# Altium PCB D5035_01.PcbDoc
Units mil, origin at the board's own origin, x right, y up, seen from the top; angles counter-clockwise.
Board outline 2401.57 x 1299.21 mil, 2 copper layers (Top Layer, Bottom Layer), stack 61.811 mil thick; 73 components, 59 nets, 270 pads, 40 vias.
Unrouted connection lines stored in the file: 1.
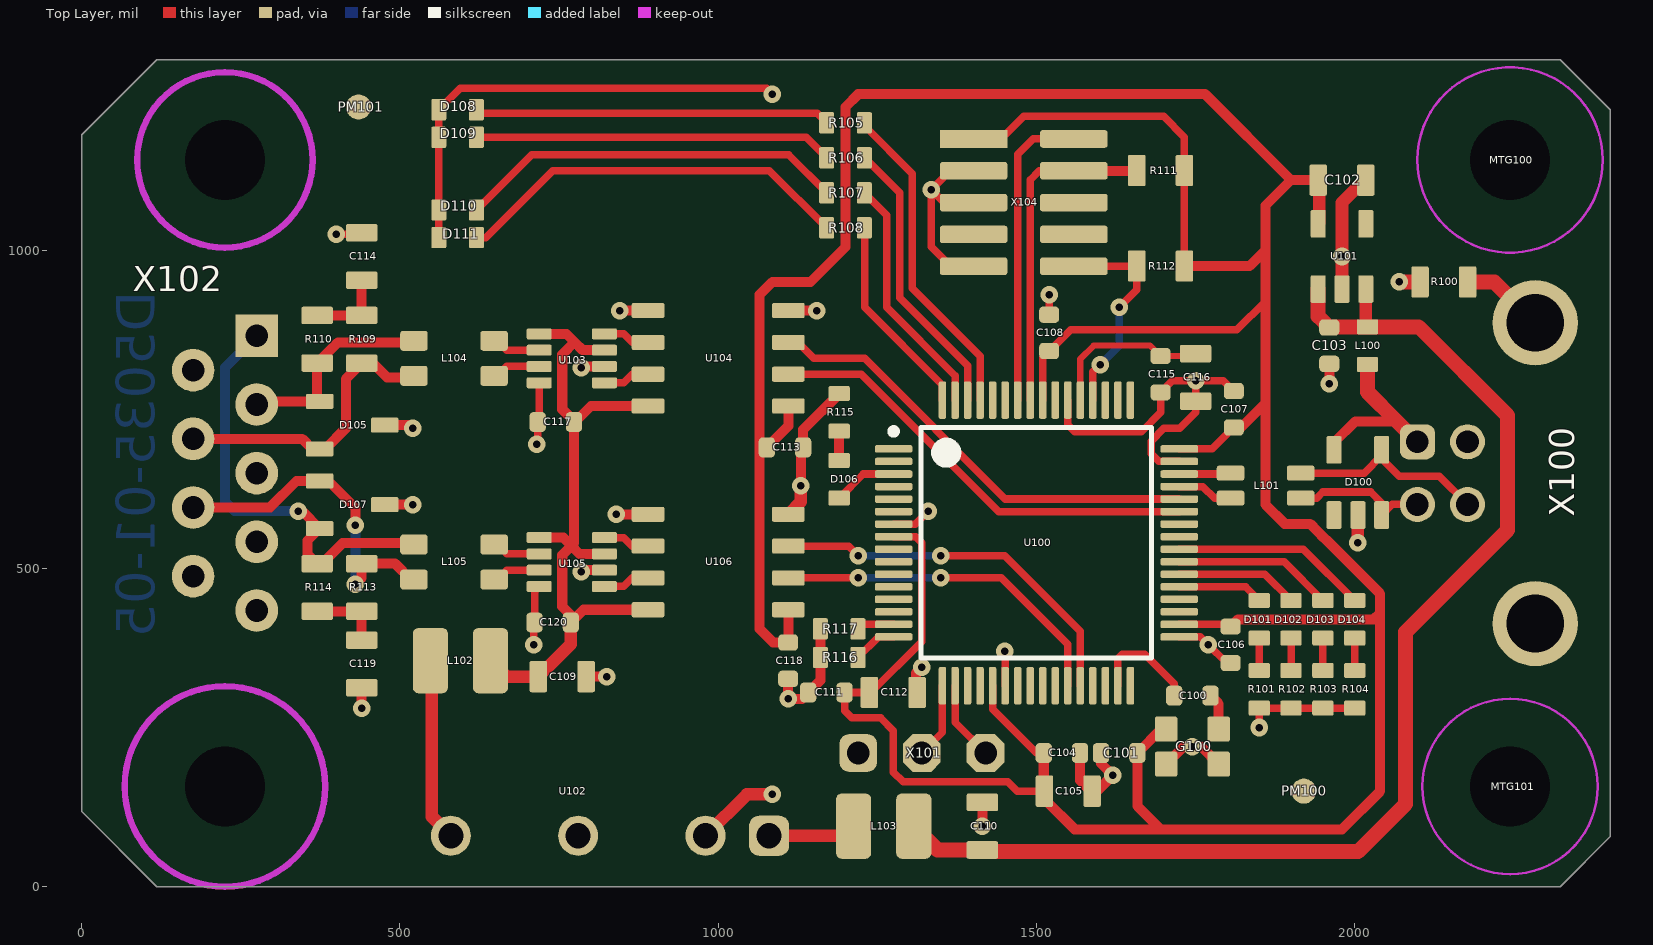
[diagram p0: Top Layer view]
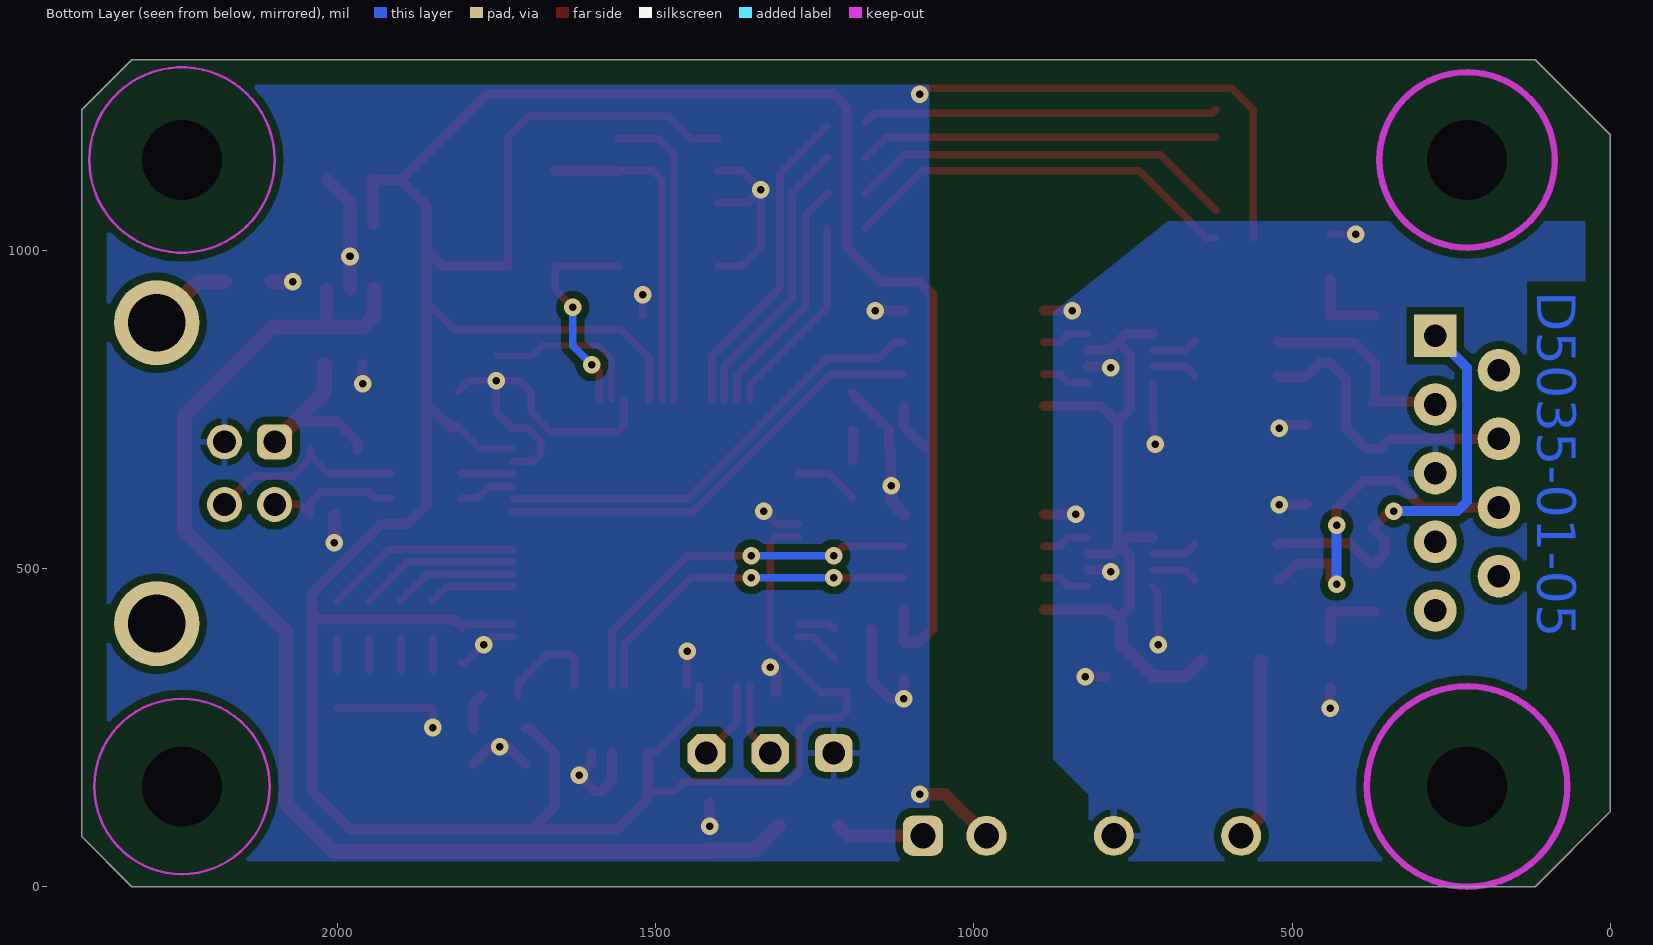
[diagram p1: Bottom Layer view, seen from below]

## Layer stack, top to bottom
Top Solder: solder mask 0.3937, Solder Resist, Dk 3.5
Top Layer: signal copper 1.378
Dielectric 1: dielectric 59.0551, FR-4, Dk 4.8
Bottom Layer: signal copper 1.378
Bottom Solder: solder mask 0.3937, Solder Resist, Dk 3.5

## Board outline
0,118.11 0,1181.1 118.11,1299.21 2322.83,1299.21 2401.57,1220.47 2401.57,78.74 2322.83,0 118.11,0

## Design rules (kind name [scope] priority, off if disabled: settings)
BoardOutlineClearance [All] p1: gap=39.37 ignorepadtopadclearanceinfootprint=FALSE
Clearance [All] p1: gap=6 ignorepadtopadclearanceinfootprint=FALSE except(0: Arc-Hole Track-Hole SMDPad-Hole THPad-Hole Via-Hole Fill-Hole Poly-Hole Region-Hole Text-Hole; 12: Arc-Poly Track-Poly SMDPad-Poly THPad-Poly Via-Poly Fill-Poly Poly-Poly) // 1
DiffPairsRouting [All] p1: maxlimit=10 minlimit=7.87 mostfreqgap=10 toplayer_minwidth=9.84 toplayer_maxwidth=15 toplayer_prefwidth=11.81 bottomlayer_minwidth=9.84 bottomlayer_maxwidth=15 bottomlayer_prefwidth=11.81 maxuncoupledlength=500
HoleSize [All] p1: absolutevalues=TRUE maxlimit=200 minlimit=11.81 maxpercent=80.000 minpercent=20.000
MinimumSolderMaskSliver [All] p1: minsoldermaskwidth=2
PasteMaskExpansion [All] p1 off: expansion=0
PolygonConnect PolygonConnect_2 [IsVia] p1: connectstyle=Direct reliefconductorwidth=10 reliefentries=4 polygonreliefangle="90 Angle" airgapwidth=10
PolygonConnect PolygonConnect_1 [IsPad] p2: thpad.connectstyle=Relief thpad.reliefconductorwidth=10 thpad.reliefentries=4 thpad.polygonreliefangle="90 Angle" thpad.airgapwidth=10 smdpad.connectstyle=Direct smdpad.reliefconductorwidth=10 smdpad.reliefentries=4 smdpad.polygonreliefangle="90 Angle" smdpad.airgapwidth=10 via.connectstyle=Direct via.reliefconductorwidth=10 via.reliefentries=4 via.polygonreliefangle="90 Angle" via.airgapwidth=10
PolygonConnect [All] p3: connectstyle=Relief reliefconductorwidth=16 reliefentries=4 polygonreliefangle="90 Angle" airgapwidth=10
RoutingVias [All] p1: holewidth=11.81 width=23.62 viastyle="Through Hole" minholewidth=11.81 minwidth=23.62 maxholewidth=39.37 maxwidth=78.74
SilkToBoardRegionClearance [All] p1 off:
SilkToSilkClearance [All] p1 off: silktosilkclearance=10
SilkToSolderMaskClearance [IsPad] p1 off: minsilkscreentomaskgap=10 clearancetoexposedcopper=TRUE
SolderMaskExpansion SolderMaskExpansion_VIA [IsVia] p1: expansion=2 istentingtop=FALSE soldermaskfromhole=TRUE
SolderMaskExpansion [All] p2: expansion=2 istentingtop=FALSE
Width [All] p1: maxlimit=100 minlimit=9.84 preferedwidth=11.81 minimp=50.000000 maximp=50.000000 favimp=50.000000
23 further rules are at their usual default settings.

## Components (designator, comment, footprint, x,y, rotation, side; value= is the part's Value field where it differs from the comment)
C100 "10n" CAPC1608X09L 1745,300 r0 top
C101 "100n" CAPC1608X09L 1630,210 r0 top
C102 "4µ7" CAPC2012X14L 1980,1110 r180 top
C103 "100n" CAPC1608X09L 1960,850 r90 top
C104 "100n" CAPC1608X09L 1540,210 r180 top
C105 "4µ7" CAPC2012X14L 1550,150 r180 top
C106 "100n" CAPC1608X09L 1805,380 r90 top
C107 "100n" CAPC1608X09L 1810,750 r270 top
C108 "100n" CAPC1608X09L 1520,870 r270 top
C109 "4µ7" CAPC2012X14L 755,330 r180 top
C110 "4µ7" CAPC2012X14L 1415,95 r270 top
C111 "100n" CAPC1608X09L 1170,305 r0 top
C112 "4µ7" CAPC2012X14L 1275,305 r180 top
C113 "100n" CAPC1608X09L 1105,690 r180 top
C114 "4n7" CAPC2012X14L 440,990 r270 top
C115 "100n" CAPC1608X09L 1695,805 r90 top
C116 "4µ7" CAPC2012X14L 1750,800 r90 top
C117 "100n" CAPC1608X09L 745,730 r0 top
C118 "100n" CAPC1608X09L 1110,355 r90 top
C119 "4n7" CAPC2012X14L 440,350 r90 top
C120 "100n" CAPC1608X09L 740,415 r0 top
D100 "WE_824011" SOT95P280X110-5N 2005,635 r90 top
D101 "red" DIOC1608X06N_LED 1850,420 r90 top
D102 "yellow" DIOC1608X06N_LED 1900,420 r90 top
D103 "green" DIOC1608X06N_LED 1950,420 r90 top
D104 "blue" DIOC1608X06N_LED 2000,420 r90 top
D105 "PESD1CAN" SOT95P280X110-3N 425,725 r0 top
D106 "green" DIOC1608X06N_LED 1190,640 r270 top
D107 "PESD1CAN" SOT95P280X110-3N 425,600 r0 top
D108 "green" DIOC1608X06N_LED 590.55,1220.47 r0 top
D109 "red" DIOC1608X06N_LED 590.55,1177.17 r0 top
D110 "green" DIOC1608X06N_LED 590.55,1062.99 r0 top
D111 "red" DIOC1608X06N_LED 590.55,1019.69 r0 top
G100 "16MHz" TG2520 1745,220 r0 top
L100 "WE_742792641" INDC1608X06L 2020,850 r90 top
L101 "WE_744232090" WE_744232090 1860,630 r180 top
L102 "82103C" Murata_8200C 595,355 r0 top
L103 "82103C" Murata_8200C 1260,95 r180 top
L104 "DLW32SH101XF2L‎" ACT1210 585,830 r0 top
L105 "DLW32SH101XF2L‎" ACT1210 585,510 r0 top
MTG100 "MH_M3" HOLE_3_2MM 2244.09,1141.73 r0 top
MTG101 "MH_M3" HOLE_3_2MM 2244.09,157.48 r0 top
PM100 "Fidicual" PM100 1920,150 r0 top
PM101 "Fidicual" PM100 435,1225 r0 top
R100 "100k" RESC2012X06L 2140,950 r0 top
R101 "1k" RESC1608X06L 1850,310 r90 top
R102 "1k" RESC1608X06L 1900,310 r90 top
R103 "1k" RESC1608X06L 1950,310 r90 top
R104 "1k" RESC1608X06L 2000,310 r90 top
R105 "1k" RESC1608X06L 1200,1200 r0 top
R106 "1k" RESC1608X06L 1200,1145 r0 top
R107 "1k" RESC1608X06L 1200,1090 r0 top
R108 "1k" RESC1608X06L 1200,1035 r0 top
R109 "4k7" RESC2012X06L 440,860 r270 top
R110 "4k7" RESC2012X06L 370,860 r270 top
R111 "10k" RESC2012X06L 1695,1125 r0 top
R112 "10k" RESC2012X06L 1695,975 r0 top
R113 "4k7" RESC2012X06L 440,470 r90 top
R114 "4k7" RESC2012X06L 370,470 r90 top
R115 "1k" RESC1608X06L 1190,745 r270 top
R116 "1k" RESC1608X06L 1190,360 r180 top
R117 "1k" RESC1608X06L 1190,405 r180 top
U100 "SAME51J18A-AU / SAME51J19A-AU" TSQFP50P1200X1200X120-64N 1500,540 r0 top
U101 "MIC5317-3.3YD5" SOT95P280X110-5N 1980,990 r90 top
U102 "MER1S0505SC" MER1SxxxxC 780,80 r180 top
U103 "TCAN1044V" SOT65P280X100-8N 770,830 r180 top
U104 "SI8621EC-B-IS" SOIC127P600X175-8N 1000,830 r180 top
U105 "TCAN1044V" SOT65P280X100-8N 770,510 r180 top
U106 "SI8621EC-B-IS" SOIC127P600X175-8N 1000,510 r180 top
X100 "61729-0010BLF" 61729-XXXXXLF 2283.46,649.61 r90 top
X101 "1x3 2,54mm" PINH_1x03_2_54mm 1320,210 r0 top
X102 "9651226803" 09651226803 275,649.61 r90 top
X104 "SWD" FTSH-105-01-L-DV-K 1480,1075 r270 top

## Footprints (in the part's own frame and the unit in brackets; to place one, negate y for a bottom-side part, rotate by r counter-clockwise, add the part's x,y. Pads: shape width x height; smd on the part's side, far side on the other; paste and mask are expansions set on the pad)
61729-XXXXXLF [mm] "USB Buchse"
  rrect50% 1.4x1.4 hole 0.9: 1(1.25,4.7)
  round 1.4 hole 0.9: 2(-1.25,4.7) 3(-1.25,2.7) 4(1.25,2.7)
  round 3.4 hole 2.3: Shell(-6,0) Shell(6,0)
  body extent -6.56,-10 6.56,5.94, height 1.15
09651226803 [mm]
  rect 1.7x1.7 hole 0.9: 1(5.48,0)
  round 1.7 hole 0.9: 2(2.74,0) 3(0,0) 4(-2.74,0) 5(-5.48,0) 6(4.11,2.54) 7(1.37,2.54) 8(-1.37,2.54) 9(-4.11,2.54)
  round 0 hole 3.2 unplated: SH(-12.5,1.27) SH(12.5,1.27)
  body extent -15.6,-2 15.6,19.2, height 13.62
ACT1210 [mm]
  rrect30% 1.1x0.8 smd: 1(-1.6,0.7) 2(-1.6,-0.7) 3(1.6,-0.7) 4(1.6,0.7)
  body extent -1.6,-1.3 1.6,1.3, height 2.5
CAPC1608X09L [mm] "Chip Capacitor, 2-Leads, Body 1,6x0,8mm, IPC High Density"
  rrect50% 0.65x0.8 smd: 1(-0.725,0) 2(0.725,0)
  body extent -0.8,-0.4 0.8,0.4, height 0.6
CAPC2012X14L [mm] "Chip Capacitor, 2-Leads, Body 2,0x1,3mm, IPC High Density"
  rrect20% 0.7x1.25 smd: 1(-0.95,0) 2(0.95,0)
  body extent -1,-0.62 1,0.62, height 0.6
DIOC1608X06N_LED [mm]
  rrect20% 0.6x0.85 smd: 1(-0.75,0) 2(0.75,0)
  body extent -0.8,-0.4 0.8,0.4, height 0.7
FTSH-105-01-L-DV-K [mm] "SAMTEC FTSH 5pin doppelreihig, 1,27mm x 1,27mm"
  rect 0.7x2.7 smd: 1(-2.53,-2)
  rrect30% 0.7x2.7 smd: 2(-2.53,2) 3(-1.26,-2) 4(-1.26,2) 5(0.01,-2) 6(0.01,2) 7(1.28,-2) 8(1.28,2) 9(2.55,-2) 10(2.55,2)
  body extent -3.17,-2.92 3.18,2.92, height 6.11
HOLE_3_2MM [mm] "Mouting-Hole for screws M3 with keepout for washer"
  round 0 hole 3.2 unplated: 1(0,0)
  Keep-Out Layer circle w0.1: c0,0 r3.7
INDC1608X06L [mm] "Ferrite Bead 2-Leads, Body 1,6x0,8mm, IPC High Density"
  rrect20% 0.6x0.85 smd: 1(-0.75,0) 2(0.75,0)
  body extent -0.8,-0.4 0.8,0.4, height 0.8
MER1SxxxxC [mm]
  rrect50% 1.6x1.6 hole 1: 1(-7.62,0)
  round 1.6 hole 1: 2(-5.08,0) 4(0,0) 6(5.08,0)
  body extent -9.5,-4.77 10,1.25, height 10.1
Murata_8200C [mm]
  rrect30% 1.4x2.6 smd paste+0 mask+0.102: 1(-1.2,0)
  rrect30% 1.4x2.6 smd: 2(1.2,0)
  body extent -1.55,-1.26 1.65,1.24, height 2
PINH_1x03_2_54mm [mm] "Pin-Header 3 polig"
  rrect50% 1.5x1.5 hole 0.9: 1(-2.54,0)
  oct 1.5x1.5 hole 0.9: 2(0,0) 3(2.54,0)
  body extent -3.94,-1.27 3.81,1.27, height 8.38
PM100 [mm] "Passermarke für Bestueckungsautomaten rund"
  rect 0.2x0.2 smd mask+1: 1(0,0)
  round 1 smd: 1(0,0)
  Top Layer pour cut-out: -1.2,1.2 1.2,1.2 1.2,-1.2 -1.2,-1.2
RESC1608X06L [mm] "Chip Resistor, 2-Leads, Body 1,6x0,8mm, IPC High Density"
  rrect20% 0.6x0.85 smd: 1(-0.75,0) 2(0.75,0)
  body extent -0.8,-0.4 0.8,0.4, height 0.4
RESC2012X06L [mm] "Chip Resistor, 2-Leads, Body 2,0x1,3mm, IPC High Density"
  rrect20% 0.7x1.25 smd: 1(-0.95,0) 2(0.95,0)
  body extent -1,-0.63 1,0.63, height 0.5
SOIC127P600X175-8N [mm] "SOIC, 8-Leads, Body 5,0x4,0mm (max), Pitch 1,27mm, IPC Medium Density"
  rrect20% 1.3x0.6 smd: 1(-2.8,1.905) 2(-2.8,0.635) 3(-2.8,-0.635) 4(-2.8,-1.905) 5(2.8,-1.905) 6(2.8,-0.635) 7(2.8,0.635) 8(2.8,1.905)
  body extent -3,-2.45 3,2.45, height 1.7
SOT65P280X100-8N [mm] "SOT23, 8-Leads, Body 3,0x3,0mm (max), Pitch 0,65mm, IPC Medium Density"
  rrect30% 1x0.44 smd: 1(-1.3,0.975) 2(-1.3,0.325) 3(-1.3,-0.325) 4(-1.3,-0.975) 5(1.3,-0.975) 6(1.3,-0.325) 7(1.3,0.325) 8(1.3,0.975)
  body extent -1.47,-1.47 1.47,1.47, height 1.1
SOT95P280X110-3N [mm] "SOT23, 3-Leads, Body 3,0x3,0mm (max), Pitch 0,95mm, IPC Medium Density"
  rrect20% 1.1x0.6 smd: 1(-1.3,0.95) 2(-1.3,-0.95) 3(1.3,0)
  body extent -1.4,-1.45 1.4,1.45, height 1.3
SOT95P280X110-5N [mm] "SOT23, 5-Leads, Body 3,0x3,0mm (max), Pitch 0,95mm, IPC Medium Density"
  rrect20% 1.1x0.6 smd: 1(-1.3,0.95) 2(-1.3,0) 3(-1.3,-0.95) 4(1.3,-0.95) 5(1.3,0.95)
  body extent -1.4,-1.45 1.4,1.45, height 1.45
TG2520 [mm]
  rrect20% 0.9x1 smd: 1(-1.05,-0.7) 2(1.05,-0.7) 3(1.05,0.7) 4(-1.05,0.7)
  body extent -1.3,-1.06 1.3,1.04, height 0.8
TSQFP50P1200X1200X120-64N [mm] "TSQFP, 64-Leads, Body 10,00x10,00mm, Pitch 0,50mm, IPC Medium Density"
  rrect50% 1.5x0.3 smd: 1(-5.7,3.75) 2(-5.7,3.25) 3(-5.7,2.75) 4(-5.7,2.25) 5(-5.7,1.75) 6(-5.7,1.25) 7(-5.7,0.75) 8(-5.7,0.25) 9(-5.7,-0.25) 10(-5.7,-0.75) 11(-5.7,-1.25) 12(-5.7,-1.75) 13(-5.7,-2.25) 14(-5.7,-2.75) 15(-5.7,-3.25) 16(-5.7,-3.75) 33(5.7,-3.75) 34(5.7,-3.25) 35(5.7,-2.75) 36(5.7,-2.25) 37(5.7,-1.75) 38(5.7,-1.25) 39(5.7,-0.75) 40(5.7,-0.25) 41(5.7,0.25) 42(5.7,0.75) 43(5.7,1.25) 44(5.7,1.75) 45(5.7,2.25) 46(5.7,2.75) 47(5.7,3.25) 48(5.7,3.75)
  rrect50% 0.3x1.5 smd: 17(-3.75,-5.7) 18(-3.25,-5.7) 19(-2.75,-5.7) 20(-2.25,-5.7) 21(-1.75,-5.7) 22(-1.25,-5.7) 23(-0.75,-5.7) 24(-0.25,-5.7) 25(0.25,-5.7) 26(0.75,-5.7) 27(1.25,-5.7) 28(1.75,-5.7) 29(2.25,-5.7) 30(2.75,-5.7) 31(3.25,-5.7) 32(3.75,-5.7) 49(3.75,5.7) 50(3.25,5.7) 51(2.75,5.7) 52(2.25,5.7) 53(1.75,5.7) 54(1.25,5.7) 55(0.75,5.7) 56(0.25,5.7) 57(-0.25,5.7) 58(-0.75,5.7) 59(-1.25,5.7) 60(-1.75,5.7) 61(-2.25,5.7) 62(-2.75,5.7) 63(-3.25,5.7) 64(-3.75,5.7)
  silkscreen extent -5.82,-4.6 4.6,4.6, body extent -6,-6 6,6, height 1.2
WE_744232090 [mm] "SMD Stromkomp. Datenleitungsfilter WE-CNSW"
  rrect30% 1.1x0.6 smd: 1(-1.4,0.5) 2(1.4,0.5) 3(1.4,-0.5) 4(-1.4,-0.5)
  body extent -1.7,-0.9 1.7,0.9, height 1.8

## Part data
C100 C101 C103 C104 C106 C107 C108 C111 C113 C115 C117 C118 C120: library part CAPC_0603, "0603 Chip Capacitor", Bauteilart=Capacitor, Editor=rriedel, Kategorie=generic, PackageDescription=0603, Part Number=CAPC_0603, Status=tested, Unterart=unpolarized
C102 C105 C109 C110 C112 C114 C116 C119: library part CAPC_0805, "0805 Chip Capacitor", Bauteilart=Capacitor, Editor=rriedel, Kategorie=generic, PackageDescription=0805, Part Number=CAPC_0805, Status=tested, Unterart=unpolarized
D100: "TVS Diode Array WE-TVS", Manufacturer=Wuerth, Bauteilart=Diode, Date=22.06.2020, Distributor_1=Digi-Key, Distributor_1_Part_Number=732-4465-1-ND, Editor=rriedel, Kategorie=Part, PackageDescription=SOT23-5, Part Number=WE_824011, Part_Number_1=824011, Status=new, Unterart=ESD
D101 D102 D103 D104 D106 D108 D109 D110 D111: library part LED_0603, "LED, 0603", Bauteilart=Diode, Date=29.06.2020, Editor=rriedel, Kategorie=generic, PackageDescription=0603, Part Number=LED_0603, Status=new, Unterart=generic
D105 D107: "CAN bus ESD protection diode", Manufacturer=Nexperia, Bauteilart=Diode, Date=27.06.2020, Distributor_1=Digi-Key, Distributor_1_Part_Number=1727-3817-1-ND, Editor=rriedel, Kategorie=Part, PackageDescription=SOT23, Part Number=PESD1CAN, Part_Number_1=PESD1CAN, Status=new, Unterart=Transil
G100: library part TG2520SMN16.0000M-MCGNNM, "16MHz Oscillator, +/- 0.5ppm", Manufacturer=Epson, Bauteilart=Oscillator, Date=20.11.2021, Distributor_1=Mouser, Distributor_1_Part_Number=732-TG252S16MCGNNM3, Editor=rriedel, Kategorie=Part, PackageDescription="2,5mm x 2,0mm", Part Number=TG2520SMN16.0000M-MCGNNM, Part_Number_1=TG2520SMN16.0000M-MCGNNM, Status=new, Unterart=TG2520
L100: "SMT EMI suppression ferrite bead WE-CBF", Manufacturer=Wuerth, Bauteilart=Inductor, Date=22.06.2020, Distributor_1=Digi-Key, Distributor_1_Part_Number=732-1592-1-ND, Editor=rriedel, Kategorie=Part, PackageDescription=0603, Part Number=WE_742792641, Part_Number_1=742792641, Status=new, Unterart="Ferrite Bead"
L101: "SMD common mode noise suppressor WE-CNSW", Manufacturer=Wuerth, Bauteilart=Inductor, Date=22.06.2020, Distributor_1=Digi-Key, Distributor_1_Part_Number=732-1469-1-ND, Editor=rriedel, Kategorie=Part, PackageDescription=3216, Part Number=WE_744232090, Part_Number_1=744232090, Status=new, Unterart=Filter
L102 L103: "10µH, 0,5A, 400mR", Manufacturer=Murata, Bauteilart=Inductor, Date=27.06.2020, Distributor_1=Digi-Key, Distributor_1_Part_Number=811-2473-1-ND, Editor=rriedel, Kategorie=Part, PackageDescription="3,2x2,5 mm", Part Number=82103C, Part_Number_1=82103C, Status=new, Unterart=Power
L104 L105: library part ACT1210-101-2P-TL00, "Common Mode Filter,  -50°C ... +150°C, AEC-Q200", Manufacturer=TDK, Bauteilart=Inductor, Date=17.10.2017, Distributor_1=Farnell, Distributor_1_Part_Number=2442838, Distributor_2=Digi-Key, Distributor_2_Part_Number=445-172386-1-ND, Editor=rriedel, Kategorie=Part, PackageDescription=3225, Part Number=ACT1210-101-2P-TL00, Part_Number_1=ACT1210-101-2P-TL00, Status=tested, Unterart=Filter
MTG100 MTG101: "Mounting-Hole for M3 screws", Bauteilart=Mechanic, Date=13.05.2018, Editor=rriedel, Kategorie=No_Bom, Part Number=MH_M3, Status=tested, Unterart=Holes
PM100 PM101: library part PM100, "Passermarke für Bestueckungsautomaten 1mm rund, 2,2mm quadratischer Ausschnitt, 2,1 mm Ausstellung Loetstoplack", Bauteilart=Manufacturing, Date=22.02.2017, Editor=rriedel, Kategorie=No_Bom, PackageDescription="Passermarke 1.0mm rund", Part Number=PM100, Status=tested, Unterart=Passermarke
R100 R109 R110 R111 R112 R113 R114: library part RESC_0805, "0805 Chip Resistor", Bauteilart=Resistor, Editor=rriedel, Kategorie=generic, PackageDescription=0805, Part Number=RESC_0805, Status=tested, Unterart=generic
R101 R102 R103 R104 R105 R106 R107 R108 R115 R116 R117: library part RESC_0603, "0603 Chip Resistor", Bauteilart=Resistor, Editor=rriedel, Kategorie=generic, PackageDescription=0603, Part Number=RESC_0603, Status=tested, Unterart=generic
U100: library part SAME51J19A-AU, "32-bit Microcontroller, 120MHz Cortex M4-F, 512k FLASH,  2x CAN-FD, -40…85°C", Manufacturer=Microchip, Bauteilart=MikroController, Date=15.07.2018, Distributor_1=Digi-Key, Distributor_1_Part_Number=ATSAME51J19A-AUTCT-ND, Editor=rriedel, Kategorie=Part, PackageDescription=TQFP64-0.5mm, Part Number=SAME51J19A-AU, Part_Number_1=SAME51J19A-AU, Status=tested, Unterart="32bit Microchip"
U101: library part MIC5233-3.3, "100 mA LDO,  Vout= 3,3V, -40°C..125°C", Manufacturer=Microchip, Bauteilart=IC, ComponenLinkDescription=Datasheet, ComponenLinkURL="D:\Altium_lib_HW-Labor_GF\Altium_lib\Datenblaetter\pcb\Integrierte Schaltkreise\Microchip\mic5233.pdf", Date=15.09.2016, Distributor_1=Farnell, Distributor_1_Part_Number=2510274, Editor=rriedel, Kategorie=Part, PackageDescription=SOT23-5, Part Number=MIC5233-3.3, Part_Number_1=MIC5233-3.3YM5, Status=tested, Unterart=Linear-Regulators
U102: "Isolated 1W Single Output DC-DC Converters 5V/5V 200mA", Manufacturer=Murata, Bauteilart=Module, Date=27.06.2020, Distributor_1=Digi-Key, Distributor_1_Part_Number=811-2124-5-ND‎, Editor=rriedel, Kategorie=Part, PackageDescription="4Pin SIP", Part Number=MER1S0505SC, Part_Number_1=MER1S0505SC, Status=new, Unterart=DCDC
U103 U105: "CAN-FD transceiver 8MBit, VIO Pin", Manufacturer=TI, Bauteilart=IC, Date=28.06.2020, Distributor_1=Digi-Key, Distributor_1_Part_Number=296-TCAN1044VDDFRCT-ND, Editor=rriedel, Kategorie=Part, PackageDescription=SOT23-8, Part Number=TCAN1044V, Part_Number_1=TCAN1044VDDFR, Status=new, Unterart=CAN
U104 U106: "Dual channel digital isolator, 150Mbit, 3,75kV", Manufacturer="Silicon Labs", Bauteilart=IC, Date=29.06.2020, Distributor_1=Digi-Key, Distributor_1_Part_Number=336-4776-1-ND, Editor=rriedel, Kategorie=Part, PackageDescription=SO8, Part Number=SI8621EC-B-IS, Part_Number_1=SI8621EC-B-IS, Status=new, Unterart=Isolator
X100: "USB-B socket, THT", Manufacturer=Amphenol, Bauteilart=Connector, Date=28.06.2020, Distributor_1=Digi-Key, Distributor_1_Part_Number=609-1039-ND, Editor=rriedel, Kategorie=Part, PackageDescription=USB-B, Part Number=61729-0010BLF, Part_Number_1=61729-0010BLF, Status=new, Unterart=USB
X101: library part PINH_1x3_2_54, "Pin-Header 2,54 mm 3pins", Bauteilart=Connector, Date=02.02.2017, Editor=rriedel, Kategorie=generic, Part Number=PINH_1x3_2_54, Status=tested, Unterart=Pin-Header
X102: "D-Sub, 9 pin, male, right angle", Manufacturer=Harting, Bauteilart=Connector, Date=29.06.2020, Distributor_1=Farnell, Distributor_1_Part_Number=2752007, Editor=rriedel, Kategorie=Part, PackageDescription=D-Sub, Part Number=9651226803, Part_Number_1=9651226803, Status=new, Unterart=D-Sub
X104: "ARM Debug-Header 2x5 1,27 mm", Bauteilart=Connector, Date=12.08.2018, Editor=rriedel, Kategorie=Part, PackageDescription="2x5 1,27mm", Part Number=SWD, Status=tested, Unterart=Debug

## Via types
v1: diameter 27.56, hole 11.81, Top Layer to Bottom Layer, tented both sides, 40 vias

## Nets (pads, with @x,y where several pads share a name; then routed paths per layer and width w, separated by ;. In a path a pad name is that pad's centre, name@x,y a point inside that pad or via, vN(x,y) a via of type N, cw(c..) or ccw(c..) an arc to the next point about the centre after c; other vN are vias at no path point)
3V3: C101.2 C102.2 C104.2 C105.2 C106.2 C107.2 C108.2 C111.2 C112.2 C113.2 C118.2 G100.4 R111.2 R112.2 U100.8 U100.21 U100.34 U100.48 U100.56 U101.5 U104.1 U106.1 X104.1 | length 6479.6
  Top Layer w11.81: U100.8 1310.16,549.84 1320,540 1320,385 1319.57,385 1239.57,305 C111.2 1198.54,276.46 1210,265 1255,265 1275,245 1275,180 1290.43,164.57 1455,164.57 1469.57,150 C105.2@1514.57,150 ; X104.1 1444.6,1174.6 1480,1210 1700,1210 1732.4,1177.6 R111.2 R112.2 ; U100.21 1431.1,278.9 1500,210 C104.2 ; U100.56 1509.84,831.3 C108.2 1553.54,875 1815,875 1860,920 ; U100.34 1801.5,412.05 C106.2 ; U100.48 1776.18,687.64 C107.2
  Top Layer w15.75: C113.2@1070,690 C113.2 1110.24,723.78 U104.1 ; U106.1 1110.24,383.78 C118.2 1086.46,383.54 1065,405 1065,930 1085,950 1145,950 1200,1005 1200,1225 1220,1245 1765,1245 1900,1110 ; C104.2 1511.46,153.11 1514.57,150 1514.57,135.43 1560,90 1695,90 ; G100.4 1696.1,247.56 C101.2 1658.54,126.46 1695,90 ; R112.2 1835,975 1860,1000 ; C106.2 1816.46,420 2030,420 2040,430 ; C107.2 1821.46,721.46 1860,760 ; C102.2@1944.57,1110 C102.2 1900,1110 ; 1695,90 1980,90 2040,150 2040,430 ; 1860,760 1860,920 1860,1000 ; 1860,760 1860,600 1890,570 1930,570 1941.91,558.09 1941.91,557.8 1951.42,548.29 1951.71,548.29 1956.71,543.29 2040,460 2040,430 ; 1860,1000 1860,1070 1900,1110
  Top Layer w19.68: U101.5 1944.57,1043.15 C102.2@1944.57,1110
5V: C103.2 C110.2 L100.2 L103.1 U101.1 U101.3 | length 1962.7
  Top Layer w19.68: U101.3 2017.4,882.13 L100.2
  Top Layer w23.62: L103.1 1344.65,57.6 C110.2 1417.6,55 2005,55 2080,130 2080,400 2240,560 2240,740 2100.47,879.53 L100.2 1960.98,879.53 C103.2 1942.6,895.94 U101.1
5V2: C109.2 C117.2 C120.2 L102.2 U103.3 U103.5 U104.8 U105.3 U105.5 U106.8 | length 1142.6
  Top Layer w15.75: U105.5 756.61,548.39 769.41,535.59 ; U103.5 761.61,868.39 774.41,855.59 ; C117.2 773.54,539.72 769.41,535.59 ; U105.3 782.2,522.8 769.41,535.59 ; U103.3 787.2,842.8 774.41,855.59 ; U106.8 788.54,435 C120.2 768.54,426.46 755,440 755,521.18 769.41,535.59 ; U104.8 800,755 775,730 755,750 755,836.18 774.41,855.59
  Top Layer w19.68: L102.2 667.24,330 C109.2 768.54,380.94 C120.2
CAN_RX_1: U100.44 U104.3 | length 716.1
  Top Layer w12: U104.3 1125,855 1150,830 1230,830 1451.1,608.9 U100.44
CAN_RX_2: U100.28 U106.3 | length 599.6
  Top Layer w11.81: U106.3 1205,535 v1(1220,520) ; v1(1350,520) 1450,520 1568.9,401.1 U100.28
  Bottom Layer w11.81: v1(1220,520) v1(1350,520)
CAN_TX_1: U100.43 U104.2 | length 703.6
  Top Layer w12: U104.2 1225,805 1440.79,589.21 U100.43
CAN_TX_2: U100.27 U106.2 | length 547.3
  Top Layer w11.81: U106.2 v1(1220,485) ; v1(1350,485) 1445,485 1549.21,380.79 U100.27
  Bottom Layer w11.81: v1(1220,485) v1(1350,485)
Debug_LED: D106.2 U100.3 | length 101.2
  Top Layer w11.81: D106.2 1227.8,648.27 U100.3
GND: C101.1 C102.1 C103.1 C104.1 C105.1 C106.1 C107.1 C108.1 C110.1 C111.1 C112.1 C113.1 C115.1 C116.1 C118.1 D100.2 D108.1 D109.1 D110.1 D111.1 G100.1 G100.2 R100.1 R101.1 R102.1 R103.1 R104.1 R115.1 R116.2 R117.2 U100.7 U100.22 U100.33 U100.47 U100.54 U101.2 U102.2 U104.4 U106.4 X100.4 X101.1 X104.3 X104.5 X104.9 | length 3269.2
  Top Layer w11.81: D111.1 D110.1 D109.1 D108.1 594.49,1253.94 1076.06,1253.94 v1(1085,1245) ; U100.7 1309.53,569.53 v1(1330,590) ; X104.9 1365.4,974.6 1335,1005 v1(1335,1095) ; X104.5 1355.4,1074.6 v1(1335,1095) ; X104.3 1364.6,1124.6 v1(1335,1095) ; v1(1450,370) 1450.79,369.21 U100.22 ; C108.1 v1(1520,930) ; U100.54 1549.21,725.79 1560,715 1665,715 1695,745 C115.1 1713.54,795 v1(1750,795) ; U100.33 1757.64,392.36 v1(1770,380) 1798.54,351.46 C106.1 ; U100.47 1692.05,667.95 1680,680 1680,700 1700,720 1725,720 1750,745 v1(1750,795) ; C107.1 1793.54,795 v1(1750,795) ; v1(1850,250) R101.1 R102.1 R103.1 R104.1
  Top Layer w15.75: C118.1 v1(1110,295) 1131.46,295 C111.1 1160.47,324.02 R116.2 R117.2 ; U104.4 v1(1155,905) ; v1(1130,630) 1130,686.46 C113.1 1133.54,718.07 R115.1 ; C112.1@1310.43,305 1310.43,335.43 v1(1320,345) ; v1(1415,95) C110.1 ; C104.1 1568.54,166.89 C105.1@1585.43,150 ; C105.1 1595,150 v1(1620,175) 1601.46,193.54 C101.1 ; G100.1 1731.22,220 v1(1745,220) 1758.78,220 G100.2 ; v1(1960,790) C103.1
  Top Layer w19.68: U102.2 1045,145 v1(1085,145) ; U106.4 1130,604.76 v1(1130,630) ; U101.2 v1(1980,990) 1980,1074.57 C102.1@2015.43,1110 ; v1(2005,540) D100.2
  Top Layer w23.62: v1(2070,950) R100.1
GND2: C109.1 C114.1 C117.1 C119.1 C120.1 D105.3 D107.3 U102.4 U103.2 U103.8 U104.5 U105.2 U105.8 U106.5 X102.3 | length 557.3
  Top Layer w11.81: v1(400,1025) 439.57,1025 C114.1@440,1025.43 ; v1(710,380) 710,413.54 C120.1 711.46,464.25 U105.8 ; v1(715,695) 716.46,696.46 C117.1 718.82,732.36 U103.8
  Top Layer w15.75: v1(440,280) C119.1 ; D107.3 v1(520,600) ; D105.3 515,725 v1(520,720) ; v1(785,495) 787.2,497.2 U105.2 ; v1(785,815) 787.2,817.2 U103.2 ; C109.1 v1(825,330) ; v1(840,585) U106.5 ; v1(845,905) U104.5
NetC100_1: C100.1 U100.31 | length 171.6
  Top Layer w11.81: U100.31 1627.95,357.95 1635,365 1670,365 1716.46,318.54 C100.1
NetC100_2: C100.2 G100.3 | length 57.7
  Top Layer w15.75: C100.2 1786.34,287.2 G100.3
NetC114_2: C114.2 R109.1 R110.1 | length 127.2
  Top Layer w15.75: R110.1 R109.1 C114.2@440,954.57
NetC115_2: C115.2 C116.2 U100.53 | length 261.9
  Top Layer w9.84: U100.53 1568.9,828.9 1590,850 1678.54,850 C115.2 1748.11,833.54 C116.2@1750,835.43
NetC119_2: C119.2 R113.1 R114.1 | length 115.2
  Top Layer w15.75: R114.1 R113.1 C119.2
NetD100_3: D100.3 L101.1 X100.2 | length 220.2
  Top Layer w11.81: L101.1 1940.32,610.32 1950,620 2025,620 2042.4,602.6 D100.3 2058.98,600.39 X100.2
NetD100_4: D100.4 L101.4 X100.3 | length 317
  Top Layer w11.81: L101.4 2014.69,649.69 D100.4@2042.4,677.4 ; D100.4 D100.4@2042.4,677.4 ; X100.3 2132.56,645 2070,645 2042.4,672.6 D100.4@2042.4,677.4
NetD101_1: D101.1 R101.2 | length 50.9
  Top Layer w11.81: R101.2 D101.1
NetD101_2: D101.2 U100.37 | length 134.5
  Top Layer w11.81: U100.37 1828.43,471.1 D101.2
NetD102_1: D102.1 R102.2 | length 50.9
  Top Layer w11.81: R102.2 D102.1
NetD102_2: D102.2 U100.38 | length 192.7
  Top Layer w11.81: U100.38 1858.74,490.79 D102.2
NetD103_1: D103.1 R103.2 | length 50.9
  Top Layer w11.81: R103.2 D103.1
NetD103_2: D103.2 U100.39 | length 250.8
  Top Layer w11.81: U100.39 1889.06,510.47 D103.2
NetD104_1: D104.1 R104.2 | length 50.9
  Top Layer w11.81: R104.2 D104.1
NetD104_2: D104.2 U100.40 | length 309
  Top Layer w11.81: U100.40 1919.37,530.16 D104.2
NetD106_1: D106.1 R115.2 | length 45.9
  Top Layer w15.75: D106.1 R115.2
NetD108_2: D108.2 R105.1 | length 558.9
  Top Layer w11.81: D108.2 625.55,1215 1155.47,1215 R105.1
NetD109_2: D109.2 R106.1 | length 563.7
  Top Layer w11.81: D109.2 1138.31,1177.17 R106.1
NetD110_2: D110.2 R107.1 | length 611.3
  Top Layer w11.81: D110.2 707.09,1150 1110.47,1150 R107.1
NetD111_2: D111.2 R108.1 | length 631.3
  Top Layer w11.81: D111.2 634.69,1019.69 740,1125 1080.47,1125 R108.1
NetL102_1: L102.1 U102.6 | length 288.4
  Top Layer w19.68: L102.1 550,352.76 550,110 U102.6
NetL103_2: L103.2 U102.1 | length 139
  Top Layer w19.68: U102.1 1197.76,80 L103.2
NetL104_3: L104.3 U103.7 | length 71.9
  Top Layer w11.81: L104.3@652.99,802.44 667.76,817.2 U103.7
NetL104_4: L104.4 U103.6 | length 71.9
  Top Layer w11.81: L104.4@652.99,857.56 667.76,842.8 U103.6
NetL105_3: L105.3 U105.7 | length 71.9
  Top Layer w11.81: L105.3@652.99,482.44 667.76,497.2 U105.7
NetL105_4: L105.4 U105.6 | length 71.9
  Top Layer w11.81: L105.4@652.99,537.56 667.76,522.8 U105.6
NetR100_2: R100.2 X100.Shell | length 132.6
  Top Layer w23.62: R100.2 2219.29,950 X100.Shell@2283.46,885.83
NetR105_2: R105.2 U100.61 | length 504.6
  Top Layer w11.81: R105.2@1230.79,1194.21 1305,1120 1305,940 1411.42,833.58 U100.61
NetR106_2: R106.2 U100.62 | length 448.1
  Top Layer w11.81: R106.2 1230,1145 1285,1090 1285,925 1391.73,818.27 U100.62
NetR107_2: R107.2 U100.63 | length 384.8
  Top Layer w11.81: R107.2@1229.76,1090.24 1265,1055 1265,910 1372.05,802.95 U100.63
NetR108_2: R108.2 U100.64 | length 321.3
  Top Layer w11.81: R108.2@1230,1035 1230,910 1352.36,787.64 U100.64
NetR116_1: R116.1 U100.16 | length 69.5
  Top Layer w11.81: R116.1 1251.89,392.36 U100.16
NetR117_1: R117.1 U100.15 | length 59
  Top Layer w11.81: R117.1 1226.58,412.05 U100.15
NetU100_17: U100.17 X101.2 | length 119
  Top Layer w11.81: X101.2 1352.36,242.36 U100.17
NetU100_18: U100.18 X101.3 | length 125.5
  Top Layer w11.81: U100.18 1372.05,257.95 X101.3
NetU103_1: U103.1 U104.7 | length 74.1
  Top Layer w11.81: U103.1 851.61,791.61 865,805 U104.7
NetU103_4: U103.4 U104.6 | length 74.1
  Top Layer w11.81: U103.4 851.61,868.39 865,855 U104.6
NetU105_1: U105.1 U106.7 | length 74.1
  Top Layer w11.81: U105.1 851.61,471.61 865,485 U106.7
NetU105_4: U105.4 U106.6 | length 74.1
  Top Layer w11.81: U105.4 851.61,548.39 865,535 U106.6
RESETN: R112.1 U100.52 X104.10 | length 338.2
  Top Layer w11.81: X104.10 1559.14,975 R112.1 1657.6,937.6 v1(1630,910) ; U100.52 1588.58,808.58 v1(1600,820)
  Bottom Layer w11.81: v1(1600,820) 1630,850 v1(1630,910)
SWCLK: R111.1 U100.57 X104.4 | length 519.3
  Top Layer w11.81: U100.57 1490.16,1110.16 1504.6,1124.6 X104.4
  Top Layer w15.75: X104.4 1657.2,1124.6 R111.1
SWDIO: U100.58 X104.2 | length 484.3
  Top Layer w11.81: U100.58 1470.47,1150.47 1494.6,1174.6 X104.2
USB_N: L101.2 U100.45 | length 88.3
  Top Layer w11.81: U100.45 1761.42,628.58 1780,610 1804.57,610 L101.2
USB_P: L101.3 U100.46 | length 81.1
  Top Layer w11.81: U100.46 1803.46,648.27 L101.3
VBUS: D100.5 L100.1 X100.1 | length 278
  Top Layer w15.75: D100.5 1967.6,697.6 2001.12,731.12 2066.12,731.12
  Top Layer w23.62: L100.1 2020,777.24 2066.12,731.12 X100.1
X_CAN_1_H: D105.2 L104.2 R109.2 X102.7 | length 465.4
  Top Layer w15.75: X102.7 346.46,703.54 362.4,687.6 D105.2 382.6,687.6 415,720 415,797.6 R109.2 457.4,822.6 480,800 519.57,800 L104.2
X_CAN_1_L: D105.1 L104.1 R110.2 X102.2 | length 329.1
  Top Layer w15.75: X102.2 279.92,762.4 D105.1 370,766.22 R110.2 402.4,855 519.45,855 L104.1
X_CAN_2_H: D107.1 L105.2 R113.2 X102.8 | length 538.7
  Top Layer w15.75: X102.8 295.67,595.67 337.4,637.4 D107.1 387.6,637.4 430,595 v1(430,567.65) ; v1(430,475) 440,485 R113.2 492.6,507.4 517.56,482.44 L105.2
  Bottom Layer w15.75: v1(430,475) v1(430,567.65)
X_CAN_2_L: D107.2 L105.1 R114.2 X102.1 | length 683.2
  Top Layer w15.75: v1(340,590) 346.42,590 D107.2 355,543.78 355,522.4 R114.2 377.4,507.4 410,540 517.56,540 520,537.56 L105.1
  Bottom Layer w15.75: X102.1 225,815.35 225,605 240,590 v1(340,590)
pads on no net: D100.1 MTG100.1 MTG101.1 PM100.1 PM101.1 U100.1 U100.2 U100.4 U100.5 U100.6 U100.9 U100.10 U100.11 U100.12 U100.13 U100.14 U100.19 U100.20 U100.23 U100.24 U100.25 U100.26 U100.29 U100.30 U100.32 U100.35 U100.36 U100.41 U100.42 U100.49 U100.50 U100.51 U100.55 U100.59 U100.60 U101.4 X102.4 X102.5 X102.6 X102.9 X102.SH X104.6 X104.7 X104.8

## Polygon pours and split planes (outlines as drawn)
GND on Bottom Layer "GND_L02_P006" (solid, remove dead copper, pour order 6): 1070,1299.21 2401.58,1299.21 2401.58,0 1070,0
GND2 on Bottom Layer "GND2_L02_P007" (solid, remove dead copper, pour order 7): 875,902.61 695,1045 0,1045 0,-10 504.19,-10 819.57,-5 819.57,144.57 875,200

## Keep-outs
Keep-Out Layer:
  circle w10: c225,1141.73 r137.8
  circle w10: c225,157.48 r157.48

## Other copper
Bottom Layer:
  text "D5035-01-05" at 115,935 h60 r90

## Silkscreen, mask and mechanical layers (free items; w line width, h text height)
Top Solder:
  rectangle: 925,240 1030,1000
Bottom Solder:
  rectangle: 925,240 1030,1000
M1_Dimension:
  the board outline again, w10

## Dimensions
118.11,1299.21 to 2401.57,1220.47 on M2_Measures
118.11,1299.21 to 118.11,0 on M2_Measures